# EAGLE board CT_schematic (EAGLE 7.6.0)

Size 100 x 80 mm. Coordinates in mm from the lower left corner, seen from the top.
Outline: 0,0 100,0 100,80 0,80 0,0
Copper layers (1*16): Top 0.035mm / dielectric 1.5mm / Bottom 0.035mm
Design rules "default": minimum track width 10mil, minimum drill 24mil, track to track 8mil, track to pad 8mil, pad to pad 8mil, via to via 8mil, smd to smd 8mil, copper to edge 40mil, drill to drill 8mil, minimum pad ring 10mil, minimum via ring 8mil, stop-mask expansion 4mil, vias tented up to drill 0mil, thermal gap 10mil

## Footprints (pad centres in the part's own frame; a part is rotated, then mirrored left to right if it is on the bottom)
C0603 = smd 0.8 x 0.8: 1 -0.762,0; 2 0.762,0
C0402 = smd 0.5 x 0.5: 1 -0.508,0; 2 0.508,0
R0603 = smd 0.8 x 0.8: 1 -0.762,0; 2 0.762,0
C1206 = smd 1.3 x 1.6: 1 -1.524,0; 2 1.524,0
C0805 = smd 1.2 x 1.3: 1 -1.016,0; 2 1.016,0
C1210 = smd 1.2 x 2.5: 1 -1.524,0; 2 1.524,0
EXV-9H = smd 3.505 x 1.676: 1 -2.857,0; 2 2.857,0
L0603 = smd 0.8 x 0.8: 1 -0.762,0; 2 0.762,0
PJ-037B_PACKAGE = drill 3.7 square: 1 12,0 | drill 3.2 square: 2 6,0
LQFP176 = smd 0.3 x 1.2: 1 -10.75,-12.75; 2 -10.25,-12.75; 3 -9.75,-12.75; 4 -9.25,-12.75; 5 -8.75,-12.75; 6 -8.25,-12.75; 7 -7.75,-12.75; 8 -7.25,-12.75; 9 -6.75,-12.75; 10 -6.25,-12.75; 11 -5.75,-12.75; 12 -5.25,-12.75; 13 -4.75,-12.75; 14 -4.25,-12.75; 15 -3.75,-12.75; 16 -3.25,-12.75; 17 -2.75,-12.75; 18 -2.25,-12.75; 19 -1.75,-12.75; 20 -1.25,-12.75; 21 -0.75,-12.75; 22 -0.25,-12.75; 23 0.25,-12.75; 24 0.75,-12.75; 25 1.25,-12.75; 26 1.75,-12.75; 27 2.25,-12.75; 28 2.75,-12.75; 29 3.25,-12.75; 30 3.75,-12.75; 31 4.25,-12.75; 32 4.75,-12.75; 33 5.25,-12.75; 34 5.75,-12.75; 35 6.25,-12.75; 36 6.75,-12.75; 37 7.25,-12.75; 38 7.75,-12.75; 39 8.25,-12.75; 40 8.75,-12.75; 41 9.25,-12.75; 42 9.75,-12.75; 43 10.25,-12.75; 44 10.75,-12.75; 89 10.75,12.75; 90 10.25,12.75; 91 9.75,12.75; 92 9.25,12.75; 93 8.75,12.75; 94 8.25,12.75; 95 7.75,12.75; 96 7.25,12.75; 97 6.75,12.75; 98 6.25,12.75; 99 5.75,12.75; 100 5.25,12.75; 101 4.75,12.75; 102 4.25,12.75; 103 3.75,12.75; 104 3.25,12.75; 105 2.75,12.75; 106 2.25,12.75; 107 1.75,12.75; 108 1.25,12.75; 109 0.75,12.75; 110 0.25,12.75; 111 -0.25,12.75; 112 -0.75,12.75; 113 -1.25,12.75; 114 -1.75,12.75; 115 -2.25,12.75; 116 -2.75,12.75; 117 -3.25,12.75; 118 -3.75,12.75; 119 -4.25,12.75; 120 -4.75,12.75; 121 -5.25,12.75; 122 -5.75,12.75; 123 -6.25,12.75; 124 -6.75,12.75; 125 -7.25,12.75; 126 -7.75,12.75; 127 -8.25,12.75; 128 -8.75,12.75; 129 -9.25,12.75; 130 -9.75,12.75; 131 -10.25,12.75; 132 -10.75,12.75 | smd 1.2 x 0.3: 45 12.75,-10.75; 46 12.75,-10.25; 47 12.75,-9.75; 48 12.75,-9.25; 49 12.75,-8.75; 50 12.75,-8.25; 51 12.75,-7.75; 52 12.75,-7.25; 53 12.75,-6.75; 54 12.75,-6.25; 55 12.75,-5.75; 56 12.75,-5.25; 57 12.75,-4.75; 58 12.75,-4.25; 59 12.75,-3.75; 60 12.75,-3.25; 61 12.75,-2.75; 62 12.75,-2.25; 63 12.75,-1.75; 64 12.75,-1.25; 65 12.75,-0.75; 66 12.75,-0.25; 67 12.75,0.25; 68 12.75,0.75; 69 12.75,1.25; 70 12.75,1.75; 71 12.75,2.25; 72 12.75,2.75; 73 12.75,3.25; 74 12.75,3.75; 75 12.75,4.25; 76 12.75,4.75; 77 12.75,5.25; 78 12.75,5.75; 79 12.75,6.25; 80 12.75,6.75; 81 12.75,7.25; 82 12.75,7.75; 83 12.75,8.25; 84 12.75,8.75; 85 12.75,9.25; 86 12.75,9.75; 87 12.75,10.25; 88 12.75,10.75; 133 -12.75,10.75; 134 -12.75,10.25; 135 -12.75,9.75; 136 -12.75,9.25; 137 -12.75,8.75; 138 -12.75,8.25; 139 -12.75,7.75; 140 -12.75,7.25; 141 -12.75,6.75; 142 -12.75,6.25; 143 -12.75,5.75; 144 -12.75,5.25; 145 -12.75,4.75; 146 -12.75,4.25; 147 -12.75,3.75; 148 -12.75,3.25; 149 -12.75,2.75; 150 -12.75,2.25; 151 -12.75,1.75; 152 -12.75,1.25; 153 -12.75,0.75; 154 -12.75,0.25; 155 -12.75,-0.25; 156 -12.75,-0.75; 157 -12.75,-1.25; 158 -12.75,-1.75; 159 -12.75,-2.25; 160 -12.75,-2.75; 161 -12.75,-3.25; 162 -12.75,-3.75; 163 -12.75,-4.25; 164 -12.75,-4.75; 165 -12.75,-5.25; 166 -12.75,-5.75; 167 -12.75,-6.25; 168 -12.75,-6.75; 169 -12.75,-7.25; 170 -12.75,-7.75; 171 -12.75,-8.25; 172 -12.75,-8.75; 173 -12.75,-9.25; 174 -12.75,-9.75; 175 -12.75,-10.25; 176 -12.75,-10.75
SOIC-8 = smd 1.6 x 0.6: 1 -2.7,1.905 | smd 1.55 x 0.6: 2 -2.7,0.635; 3 -2.7,-0.635; 4 -2.7,-1.905; 5 2.7,-1.905; 6 2.7,-0.635; 7 2.7,0.635; 8 2.7,1.905
FCI_10118193-0001LF = smd 0.4 x 1.35: 1 -1.3,2.675; 2 -0.65,2.675; 3 0,2.675; 4 0.65,2.675; 5 1.3,2.675 | smd 1.6 x 1.4: 6 -3.2,2.45; 7 3.2,2.45 | smd 1.9 x 1.9: 8 -1.2,0; 9 1.2,0 | hole 0.5: -3.3,0; 3.3,0
SOT143B = smd 1 x 0.7: 1 -0.75,-1 | smd 0.6 x 0.7: 2 0.95,-1; 3 0.95,1; 4 -0.95,1
QFN-24 = smd 0.7 x 0.305: 1 -1.815,1.25; 2 -1.815,0.75; 3 -1.815,0.25; 4 -1.815,-0.25; 5 -1.815,-0.73; 6 -1.815,-1.25; 13 1.815,-1.25; 14 1.815,-0.75; 15 1.815,-0.25; 16 1.815,0.25; 17 1.815,0.75; 18 1.815,1.25 | smd 0.305 x 0.7: 7 -1.25,-1.815; 8 -0.75,-1.815; 9 -0.25,-1.815; 10 0.25,-1.815; 11 0.75,-1.815; 12 1.25,-1.815; 19 1.25,1.815; 20 0.75,1.815; 21 0.25,1.815; 22 -0.25,1.815; 23 -0.75,1.815; 24 -1.25,1.815 | smd 2.591 x 2.591: 25 0,0
USB-A-H = drill 0.914: 1 2.718,3.493; 2 2.718,1.003; 3 2.718,-1.003; 4 2.718,-3.493 | drill 2.311: 5 0,-6.566; 6 0,6.566
SOT-23-6 = smd 1.1 x 0.6: 1 -1.4,0.95; 2 -1.4,0; 3 -1.4,-0.95; 4 1.4,-0.95; 5 1.4,0; 6 1.4,0.95
ABLS-25.000MHZ-B2F-T = smd 5.6 x 2.8: 1 -3.81,0; 2 5.69,0
ASEK = smd 1.4 x 1: 1 -1.1,-0.8; 2 1.1,-0.8; 3 1.1,0.8; 4 -1.1,0.8
ASFL1 = smd 1.7 x 1.5: 1 -1.27,-1.1; 2 1.27,-1.1; 3 1.27,1.1; 4 -1.27,1.1
WSON-8 = smd 0.3 x 0.6: 1 -0.75,0; 2 0.05,0; 3 0.85,0; 4 1.65,0; 5 1.65,3.8; 6 0.85,3.8; 7 0.05,3.8; 8 -0.75,3.8 | smd 3 x 2.6: PAD 0.45,1.9
QFN-38_UHF = smd 0.75 x 0.3: 1 -2.4,2.75; 2 -2.4,2.25; 3 -2.4,1.75; 4 -2.4,1.25; 6 -2.4,0.25; 7 -2.4,-0.25; 8 -2.4,-0.75; 9 -2.4,-1.25; 10 -2.4,-1.75; 11 -2.4,-2.25; 12 -2.4,-2.75; 20 2.4,-2.75; 21 2.4,-2.25; 22 2.4,-1.75; 23 2.4,-1.25; 24 2.4,-0.75; 25 2.4,-0.25; 26 2.4,0.25; 27 2.4,0.75; 28 2.4,1.25; 29 2.4,1.75; 30 2.4,2.25; 31 2.4,2.75 | smd 0.758 x 0.3: 5 -2.4,0.75 | smd 0.3 x 0.75: 13 -1.5,-3.4; 14 -1,-3.4; 15 -0.5,-3.4; 16 0,-3.4; 17 0.5,-3.4; 18 1,-3.4; 19 1.5,-3.4; 32 1.5,3.4; 33 1,3.4; 34 0.5,3.4; 35 0,3.4; 36 -0.5,3.4; 37 -1,3.4; 38 -1.5,3.4 | smd 3.2 x 5.2: 39 0,0
IRF8306MTRPBF = smd 0.9 x 1.85: 1 0,0; 2 0,-2.35; 6 6.4,0; 7 6.4,-2.35 | smd 0.75 x 0.75: 3 1.75,-1.175 | smd 1.45 x 0.87: 4 3.5,-0.565; 5 3.5,-1.785
SW_4-1437565-2 = smd 1.4 x 2.1: 1 -2.23,4.55; 2 -2.23,-4.55; 3 2.23,4.55; 4 2.23,-4.55
LGM67K-G1J2-24-Z = smd 0.8 x 1.4: A -2,0; C 0,0
NC7SZ125M5X = smd 1.3 x 0.7: 1 -1.3,0.95; 2 -1.3,0; 3 -1.3,-0.95; 4 1.3,-0.95; 5 1.3,0.95

## Placement (x,y rotation side)
C1  1e-06  [C0603]  -26.67,86.36 0 top  (outside the outline)
C2  1e-07  [C0603]  -30.48,86.36 0 top  (outside the outline)
C3  1e-07  [C0603]  -34.29,86.36 0 top  (outside the outline)
C4  1e-07  [C0603]  -38.1,86.36 0 top  (outside the outline)
C5  1e-07  [C0603]  -41.91,86.36 0 top  (outside the outline)
C6  1e-07  [C0603]  -45.72,86.36 0 top  (outside the outline)
C7  1e-07  [C0603]  -49.53,86.36 0 top  (outside the outline)
C8  1e-07  [C0603]  -53.34,86.36 0 top  (outside the outline)
C9  1e-07  [C0603]  -57.15,86.36 0 top  (outside the outline)
C10  1e-07  [C0603]  -60.96,86.36 0 top  (outside the outline)
C11  1e-07  [C0603]  -64.77,86.36 0 top  (outside the outline)
C12  1e-07  [C0603]  -68.58,86.36 0 top  (outside the outline)
C13  1e-07  [C0603]  -72.39,86.36 0 top  (outside the outline)
C14  1e-07  [C0603]  -76.2,86.36 0 top  (outside the outline)
C15  1e-07  [C0603]  -80.01,86.36 0 top  (outside the outline)
C16  1e-07  [C0603]  -83.82,86.36 0 top  (outside the outline)
C17  1e-07  [C0603]  -87.63,86.36 0 top  (outside the outline)
C18  4.7e-06  [C0603]  -15.24,86.36 0 top  (outside the outline)
C19  1e-08  [C0603]  -15.24,91.44 0 top  (outside the outline)
C20  1e-06  [C0603]  -19.05,91.44 0 top  (outside the outline)
C21  1e-07  [C0402]  -83.82,91.44 0 top  (outside the outline)
C22  1e-07  [C0402]  -87.63,91.44 0 top  (outside the outline)
C23  1e-11  [C0402]  -15.24,96.52 0 top  (outside the outline)
C24  1e-11  [C0402]  -19.05,96.52 0 top  (outside the outline)
C25  1e-06  [C0603]  -22.86,91.44 0 top  (outside the outline)
C26  1e-08  [C0402]  -22.86,96.52 0 top  (outside the outline)
C27  1e-08  [C0402]  -26.67,96.52 0 top  (outside the outline)
C28  2.2e-06  [C0603]  -19.05,86.36 0 top  (outside the outline)
C29  1e-08  [C0402]  -30.48,96.52 0 top  (outside the outline)
C30  1e-08  [C0402]  -34.29,96.52 0 top  (outside the outline)
C31  0.0001  [R0603]  -26.67,91.44 0 top  (outside the outline)
C32  1e-08  [C0402]  -38.1,96.52 0 top  (outside the outline)
C33  1e-08  [C0402]  -41.91,96.52 0 top  (outside the outline)
C34  1e-08  [C0402]  -45.72,96.52 0 top  (outside the outline)
C35  1e-05  [C1206]  -35.56,69.85 0 top  (outside the outline)
C36  1e-05  [C0805]  -77.47,69.85 0 top  (outside the outline)
C37  1e-08  [C0402]  -49.53,96.52 0 top  (outside the outline)
C38  1e-05  [C1206]  -41.91,69.85 0 top  (outside the outline)
C39  1e-05  [C0805]  -82.55,69.85 0 top  (outside the outline)
C40  1e-06  [C0603]  -30.48,91.44 0 top  (outside the outline)
C41  1e-05  [C1210]  -22.86,71.12 0 top  (outside the outline)
C42  1e-08  [C0402]  -53.34,96.52 0 top  (outside the outline)
C43  1e-05  [C1206]  -48.26,69.85 0 top  (outside the outline)
C44  1e-05  [C1210]  -29.21,71.12 0 top  (outside the outline)
C45  1e-08  [C0402]  -57.15,96.52 0 top  (outside the outline)
C46  1e-05  [C1206]  -54.61,69.85 0 top  (outside the outline)
C47  1e-05  [C0805]  -87.63,69.85 0 top  (outside the outline)
C48  1e-07  [C0402]  -60.96,96.52 0 top  (outside the outline)
C49  2.2e-06  [C0603]  -22.86,86.36 0 top  (outside the outline)
C50  2.45e-08  [R0603]  -73.66,76.2 0 top  (outside the outline)
C51  2.8258362168397e-09  [R0603]  -20.32,76.2 0 top  (outside the outline)
C52  7.105e-09  [R0603]  -38.1,76.2 0 top  (outside the outline)
C53  0.0001  [EXV-9H]  -38.1,63.5 0 top  (outside the outline)
C54  0.0001  [EXV-9H]  -49.53,63.5 0 top  (outside the outline)
C55  1e-08  [C0402]  -64.77,96.52 0 top  (outside the outline)
C56  1e-08  [C0402]  -68.58,96.52 0 top  (outside the outline)
F1  240.0  [L0603]  -34.29,91.44 0 top  (outside the outline)
J1  PJ-037B  [PJ-037B_PACKAGE]  -72.39,7.62 0 top  (outside the outline)
R2  1000.0  [R0603]  -38.1,91.44 0 top  (outside the outline)
R7  4700.0  [R0603]  -41.91,91.44 0 top  (outside the outline)
R8  4700.0  [R0603]  -45.72,91.44 0 top  (outside the outline)
R9  10000.0  [R0603]  -78.74,76.2 0 top  (outside the outline)
R10  10000.0  [R0603]  -83.82,76.2 0 top  (outside the outline)
R11  10000.0  [R0603]  -15.24,81.28 0 top  (outside the outline)
R12  10000.0  [R0603]  -20.32,81.28 0 top  (outside the outline)
R13  10000.0  [R0603]  -25.4,81.28 0 top  (outside the outline)
R14  10000.0  [R0603]  -30.48,81.28 0 top  (outside the outline)
R15  10000.0  [R0603]  -35.56,81.28 0 top  (outside the outline)
R16  47000.0  [R0603]  -40.64,81.28 0 top  (outside the outline)
R17  8060.0  [R0603]  -49.53,91.44 0 top  (outside the outline)
R18  100000.0  [R0603]  -43.18,76.2 0 top  (outside the outline)
R19  200.0  [R0603]  -53.34,91.44 0 top  (outside the outline)
R20  1000.0  [R0603]  -57.15,91.44 0 top  (outside the outline)
R21  100000.0  [R0603]  -48.26,76.2 0 top  (outside the outline)
R22  806.0  [R0603]  -60.96,91.44 0 top  (outside the outline)
R23  1000.0  [R0603]  -64.77,91.44 0 top  (outside the outline)
R24  100000.0  [R0603]  -53.34,76.2 0 top  (outside the outline)
R25  153694.38  [R0603]  -33.02,76.2 0 top  (outside the outline)
R26  100000.0  [R0603]  -58.42,76.2 0 top  (outside the outline)
R27  100000.0  [R0603]  -63.5,76.2 0 top  (outside the outline)
R28  3900.0  [R0603]  -68.58,91.44 0 top  (outside the outline)
R29  1000.0  [R0603]  -72.39,91.44 0 top  (outside the outline)
R30  100000.0  [R0603]  -68.58,76.2 0 top  (outside the outline)
R31  200.0  [R0603]  -76.2,91.44 0 top  (outside the outline)
R32  1000.0  [R0603]  -80.01,91.44 0 top  (outside the outline)
R33  10000.0  [R0603]  -45.72,81.28 0 top  (outside the outline)
R34  75000.0  [R0603]  -50.8,81.28 0 top  (outside the outline)
R35  10000.0  [R0603]  -55.88,81.28 0 top  (outside the outline)
R36  10000.0  [R0603]  -60.96,81.28 0 top  (outside the outline)
R37  95300.0  [R0603]  -66.04,81.28 0 top  (outside the outline)
R38  95300.0  [R0603]  -71.12,81.28 0 top  (outside the outline)
R39  10000.0  [R0603]  -76.2,81.28 0 top  (outside the outline)
R40  10000.0  [R0603]  -81.28,81.28 0 top  (outside the outline)
R41  10000.0  [R0603]  -86.36,81.28 0 top  (outside the outline)
R42  65036.363636364  [R0603]  -27.94,76.2 0 top  (outside the outline)
U1  STM32F429IET6  [LQFP176]  -26.67,13.97 0 top  (outside the outline)
U2  AT25M02-SSHD-T  [SOIC-8]  -43.18,33.02 0 top  (outside the outline)
U3  10118193-0001LF  [FCI_10118193-0001LF]  -73.66,53.34 0 top  (outside the outline)
U4  prtr5v0u2ax  [SOT143B]  -81.28,96.52 0 top  (outside the outline)
U5  USB3317C-CP-TR  [QFN-24]  -15.24,71.12 0 top  (outside the outline)
U6  61400416021  [USB-A-H]  -46.99,8.89 0 top  (outside the outline)
U7  prtr5v0u2ax  [SOT143B]  -24.13,101.6 0 top  (outside the outline)
U8  MAX4995AAUT+T  [SOT-23-6]  -59.69,69.85 0 top  (outside the outline)
U9  ABLS-25.000MHZ-B2F-T  [ABLS-25.000MHZ-B2F-T]  -68.58,63.5 0 top  (outside the outline)
U10  ASEK-32.768KHz-ECST  [ASEK]  -29.21,63.5 0 top  (outside the outline)
U11  ASFL1-26MHZ-NCS  [ASFL1]  -64.77,54.61 0 top  (outside the outline)
U12  LP3878SDX-ADJ/NOPB  [WSON-8]  -30.48,43.18 0 top  (outside the outline)
U13  LP3878SDX-ADJ/NOPB  [WSON-8]  -50.8,43.18 0 top  (outside the outline)
U14  LP2951ACSDX/NOPB  [WSON-8]  -48.26,52.07 0 top  (outside the outline)
U15  LP3878SDX-ADJ/NOPB  [WSON-8]  -71.12,43.18 0 top  (outside the outline)
U16  LP3878SDX-ADJ/NOPB  [WSON-8]  -30.48,52.07 0 top  (outside the outline)
U17  LTC2928CUHF#PBF  [QFN-38_UHF]  -82.55,53.34 0 top  (outside the outline)
U18  IRF8306MTRPbF  [IRF8306MTRPBF]  -60.96,34.29 0 top  (outside the outline)
U19  IRF8306MTRPbF  [IRF8306MTRPBF]  -76.2,34.29 0 top  (outside the outline)
U20  4-1437565-2  [SW_4-1437565-2]  -27.94,34.29 0 top  (outside the outline)
U21  Q65110A2395  [LGM67K-G1J2-24-Z]  -80.01,62.23 0 top  (outside the outline)
U22  nc7sz125m5x  [NC7SZ125M5X]  -64.77,69.85 0 top  (outside the outline)
U23  nc7sz125m5x  [NC7SZ125M5X]  -71.12,69.85 0 top  (outside the outline)

## Library data of the parts
C1-C56 F1 J1 R2 R7-R42 U1-U23 = circuit_tree

## Nets
CLK_CRYSTAL_U1_29: C23.1 U1.29 U9.1
CLK_CRYSTAL_U1_30: C24.1 U1.30 U9.2
CLK_U1_9: U1.9 U10.3
CLK_U5_23: U5.23 U11.3
GND: C1.2 C2.2 C3.2 C4.2 C5.2 C6.2 C7.2 C8.2 C9.2 C10.2 C11.2 C12.2 C13.2 C14.2 C15.2 C16.2 C17.2 C18.2 C19.2 C20.2 C21.2 C22.2 C23.2 C24.2 C25.2 C26.2 C27.2 C28.2 C29.2 C30.2 C31.2 C32.2 C33.2 C34.2 C35.2 C36.2 C37.2 C38.2 C39.2 C40.2 C41.2 C42.2 C43.2 C44.2 C45.2 C46.2 C47.2 C48.2 C49.2 C50.2 C51.2 C52.2 C53.2 C54.2 C55.2 C56.2 J1.2 R2.2 R11.2 R16.2 R17.2 R20.2 R23.2 R26.2 R29.2 R32.2 R34.2 R37.2 R38.2 R39.2 R40.2 R41.2 U1.14 U1.22 U1.37 U1.61 U1.71 U1.90 U1.102 U1.113 U1.122 U1.126 U1.135 U1.148 U1.158 U2.4 U3.5 U3.6 U3.7 U3.8 U3.9 U4.1 U5.1 U5.25 U6.4 U6.5 U6.6 U7.1 U8.2 U10.2 U11.2 U12.3 U12.PAD U13.3 U13.PAD U14.3 U14.4 U14.PAD U15.3 U15.PAD U16.3 U16.PAD U17.8 U17.9 U17.10 U17.12 U17.13 U17.24 U17.25 U17.30 U17.32 U17.39 U21.C U22.1 U22.3 U23.1 U23.3
NET_U1_31: R7.1 U1.31 U22.4
NET_U1_39: C19.1 C20.1 F1.1 U1.38 U1.39
NET_U1_48: R12.1 U1.48
NET_U1_58: R11.1 U1.58
NET_U1_125: C22.1 U1.125
NET_U1_166: R10.1 U1.166
NET_U1_171: R9.1 U1.171
NET_U1_175: U21.A
NET_U1_176: U20.3 U20.4
NET_U2_3: R13.1 U2.3
NET_U2_7: R15.1 U2.7
NET_U5_4: C28.1 U5.4
NET_U5_22: R8.1 U5.22 U23.4
NET_U5_24: R17.1 U5.24
NET_U6_1: C31.1 U5.2 U6.1 U7.4 U8.1
NET_U6_2: U5.5 U6.2 U7.3
NET_U6_3: U5.6 U6.3 U7.2
NET_U8_3: R16.1 U8.3
NET_U8_4: U5.7 U8.4
NET_U12_1: C34.1 U12.1
NET_U12_6: R19.2 R20.1 U12.6
NET_U12_8: R18.1 U12.8
NET_U13_1: C37.1 U13.1
NET_U13_6: R22.2 R23.1 U13.6
NET_U13_8: R21.1 U13.8
NET_U14_5: R24.1 U14.5
NET_U14_7: R25.2 R26.1 U14.7
NET_U15_1: C42.1 U15.1
NET_U15_6: R28.2 R29.1 U15.6
NET_U15_8: R27.1 U15.8
NET_U16_1: C45.1 U16.1
NET_U16_6: R31.2 R32.1 U16.6
NET_U16_8: R30.1 U16.8
NET_U17_3: R40.1 U17.3
NET_U17_6: R37.1 U17.6
NET_U17_7: R38.1 U17.7
NET_U17_16: R39.1 R42.1 U17.16
NET_U17_18: R36.1 U17.18
NET_U17_19: R35.1 U17.19 U17.20
NET_U17_21: R33.1 R34.1 U17.21 U22.2 U23.2
NET_U17_22: C48.1 R33.2 R35.2 R36.2 U17.11 U17.22
NET_U17_26: C51.1 U17.26
NET_U17_27: C50.1 U17.27
NET_U17_28: C52.1 U17.28
NET_U17_38: R41.1 U17.38
NET_U18_3: U17.2 U18.3
NET_U19_3: U17.37 U19.3
NET_U20_1: R2.1 U20.1 U20.2
PROC_SPI1_MISO: U1.52 U2.2
PROC_SPI1_MOSI: U1.53 U2.5
PROC_SPI1_NSS: R14.1 U1.50 U2.1
PROC_SPI1_SCK: U1.161 U2.6
PROC_USB_OTG_FS_DM: U1.122 U3.2 U4.3
PROC_USB_OTG_FS_DP: U1.123 U3.3 U4.2
PROC_USB_OTG_FS_VBUS: C25.1 U1.120 U3.1 U4.4
PROC_USB_OTG_HS_ULPI_CK: U1.51 U5.12
PROC_USB_OTG_HS_ULPI_D0: U1.47 U5.16
PROC_USB_OTG_HS_ULPI_D1: U1.56 U5.15
PROC_USB_OTG_HS_ULPI_D2: U1.57 U5.14
PROC_USB_OTG_HS_ULPI_D3: U1.79 U5.13
PROC_USB_OTG_HS_ULPI_D4: U1.80 U5.11
PROC_USB_OTG_HS_ULPI_D5: U1.92 U5.10
PROC_USB_OTG_HS_ULPI_D6: U1.93 U5.9
PROC_USB_OTG_HS_ULPI_D7: U1.163 U5.8
PROC_USB_OTG_HS_ULPI_DIR: U1.13 U5.19
PROC_USB_OTG_HS_ULPI_NXT: U1.35 U5.18
PROC_USB_OTG_HS_ULPI_STP: U1.32 U5.20
VCC_8V4: C49.1 C53.1 C54.1 J1.1 R42.2 U17.23 U18.1 U18.2 U18.6 U18.7 U19.1 U19.2 U19.6 U19.7
VCC_S1_8V4: C35.1 C38.1 C40.1 C43.1 R18.2 R21.2 R27.2 U12.4 U13.4 U14.8 U15.4 U18.4 U18.5
VCC_S2_8V4: C46.1 R30.2 U16.4 U19.4 U19.5
VCC_TIER1_1V2: C21.1 C36.1 R19.1 U1.81 U12.5
VCC_TIER1_1V8: C1.1 C2.1 C3.1 C4.1 C5.1 C6.1 C7.1 C8.1 C9.1 C10.1 C11.1 C12.1 C13.1 C14.1 C15.1 C16.1 C17.1 C18.1 C26.1 C29.1 C30.1 C39.1 C55.1 C56.1 F1.2 R7.2 R8.2 R9.2 R10.2 R12.2 R13.2 R14.2 R15.2 R22.1 U1.6 U1.15 U1.23 U1.36 U1.49 U1.62 U1.72 U1.82 U1.91 U1.103 U1.114 U1.127 U1.136 U1.149 U1.159 U1.172 U2.8 U5.17 U5.21 U13.5 U22.5 U23.5
VCC_TIER1_3V3: C27.1 C32.1 C33.1 C41.1 R24.2 R25.1 U5.3 U10.4 U11.4 U14.1
VCC_TIER1_5V0: C44.1 R28.1 U8.5 U15.5
VCC_TIER2_1V2: C47.1 R31.1 U16.5

## Tracks (layer width: path | path; a pad name or v marks a point on that pad's centre or on a via)
CLK_CRYSTAL_U1_29  (2 unrouted)
CLK_CRYSTAL_U1_30  (2 unrouted)
CLK_U1_9  (1 unrouted)
CLK_U5_23  (1 unrouted)
GND  (126 unrouted)
NET_U1_31  (2 unrouted)
NET_U1_39  (4 unrouted)
NET_U1_48  (1 unrouted)
NET_U1_58  (1 unrouted)
NET_U1_125  (1 unrouted)
NET_U1_166  (1 unrouted)
NET_U1_171  (1 unrouted)
NET_U1_176  (1 unrouted)
NET_U2_3  (1 unrouted)
NET_U2_7  (1 unrouted)
NET_U5_4  (1 unrouted)
NET_U5_22  (2 unrouted)
NET_U5_24  (1 unrouted)
NET_U6_1  (4 unrouted)
NET_U6_2  (2 unrouted)
NET_U6_3  (2 unrouted)
NET_U8_3  (1 unrouted)
NET_U8_4  (1 unrouted)
NET_U12_1  (1 unrouted)
NET_U12_6  (2 unrouted)
NET_U12_8  (1 unrouted)
NET_U13_1  (1 unrouted)
NET_U13_6  (2 unrouted)
NET_U13_8  (1 unrouted)
NET_U14_5  (1 unrouted)
NET_U14_7  (2 unrouted)
NET_U15_1  (1 unrouted)
NET_U15_6  (2 unrouted)
NET_U15_8  (1 unrouted)
NET_U16_1  (1 unrouted)
NET_U16_6  (2 unrouted)
NET_U16_8  (1 unrouted)
NET_U17_3  (1 unrouted)
NET_U17_6  (1 unrouted)
NET_U17_7  (1 unrouted)
NET_U17_16  (2 unrouted)
NET_U17_18  (1 unrouted)
NET_U17_19  (2 unrouted)
NET_U17_21  (4 unrouted)
NET_U17_22  (5 unrouted)
NET_U17_26  (1 unrouted)
NET_U17_27  (1 unrouted)
NET_U17_28  (1 unrouted)
NET_U17_38  (1 unrouted)
NET_U18_3  (1 unrouted)
NET_U19_3  (1 unrouted)
NET_U20_1  (2 unrouted)
PROC_SPI1_MISO  (1 unrouted)
PROC_SPI1_MOSI  (1 unrouted)
PROC_SPI1_NSS  (2 unrouted)
PROC_SPI1_SCK  (1 unrouted)
PROC_USB_OTG_FS_DM  (2 unrouted)
PROC_USB_OTG_FS_DP  (2 unrouted)
PROC_USB_OTG_FS_VBUS  (3 unrouted)
PROC_USB_OTG_HS_ULPI_CK  (1 unrouted)
PROC_USB_OTG_HS_ULPI_D0  (1 unrouted)
PROC_USB_OTG_HS_ULPI_D1  (1 unrouted)
PROC_USB_OTG_HS_ULPI_D2  (1 unrouted)
PROC_USB_OTG_HS_ULPI_D3  (1 unrouted)
PROC_USB_OTG_HS_ULPI_D4  (1 unrouted)
PROC_USB_OTG_HS_ULPI_D5  (1 unrouted)
PROC_USB_OTG_HS_ULPI_D6  (1 unrouted)
PROC_USB_OTG_HS_ULPI_D7  (1 unrouted)
PROC_USB_OTG_HS_ULPI_DIR  (1 unrouted)
PROC_USB_OTG_HS_ULPI_NXT  (1 unrouted)
PROC_USB_OTG_HS_ULPI_STP  (1 unrouted)
VCC_8V4  (13 unrouted)
VCC_S1_8V4  (12 unrouted)
VCC_S2_8V4  (4 unrouted)
VCC_TIER1_1V2  (4 unrouted)
VCC_TIER1_1V8  (55 unrouted)
VCC_TIER1_3V3  (9 unrouted)
VCC_TIER1_5V0  (3 unrouted)
VCC_TIER2_1V2  (2 unrouted)